# Altium PCB MotorDriver_Version1.0.PcbDoc
Units mm, origin at the board's own origin, x right, y up, seen from the top; angles counter-clockwise.
Board outline 82.93 x 67.82 mm, 2 copper layers (Top Layer, Bottom Layer); 112 components, 70 nets, 341 pads, 134 vias.
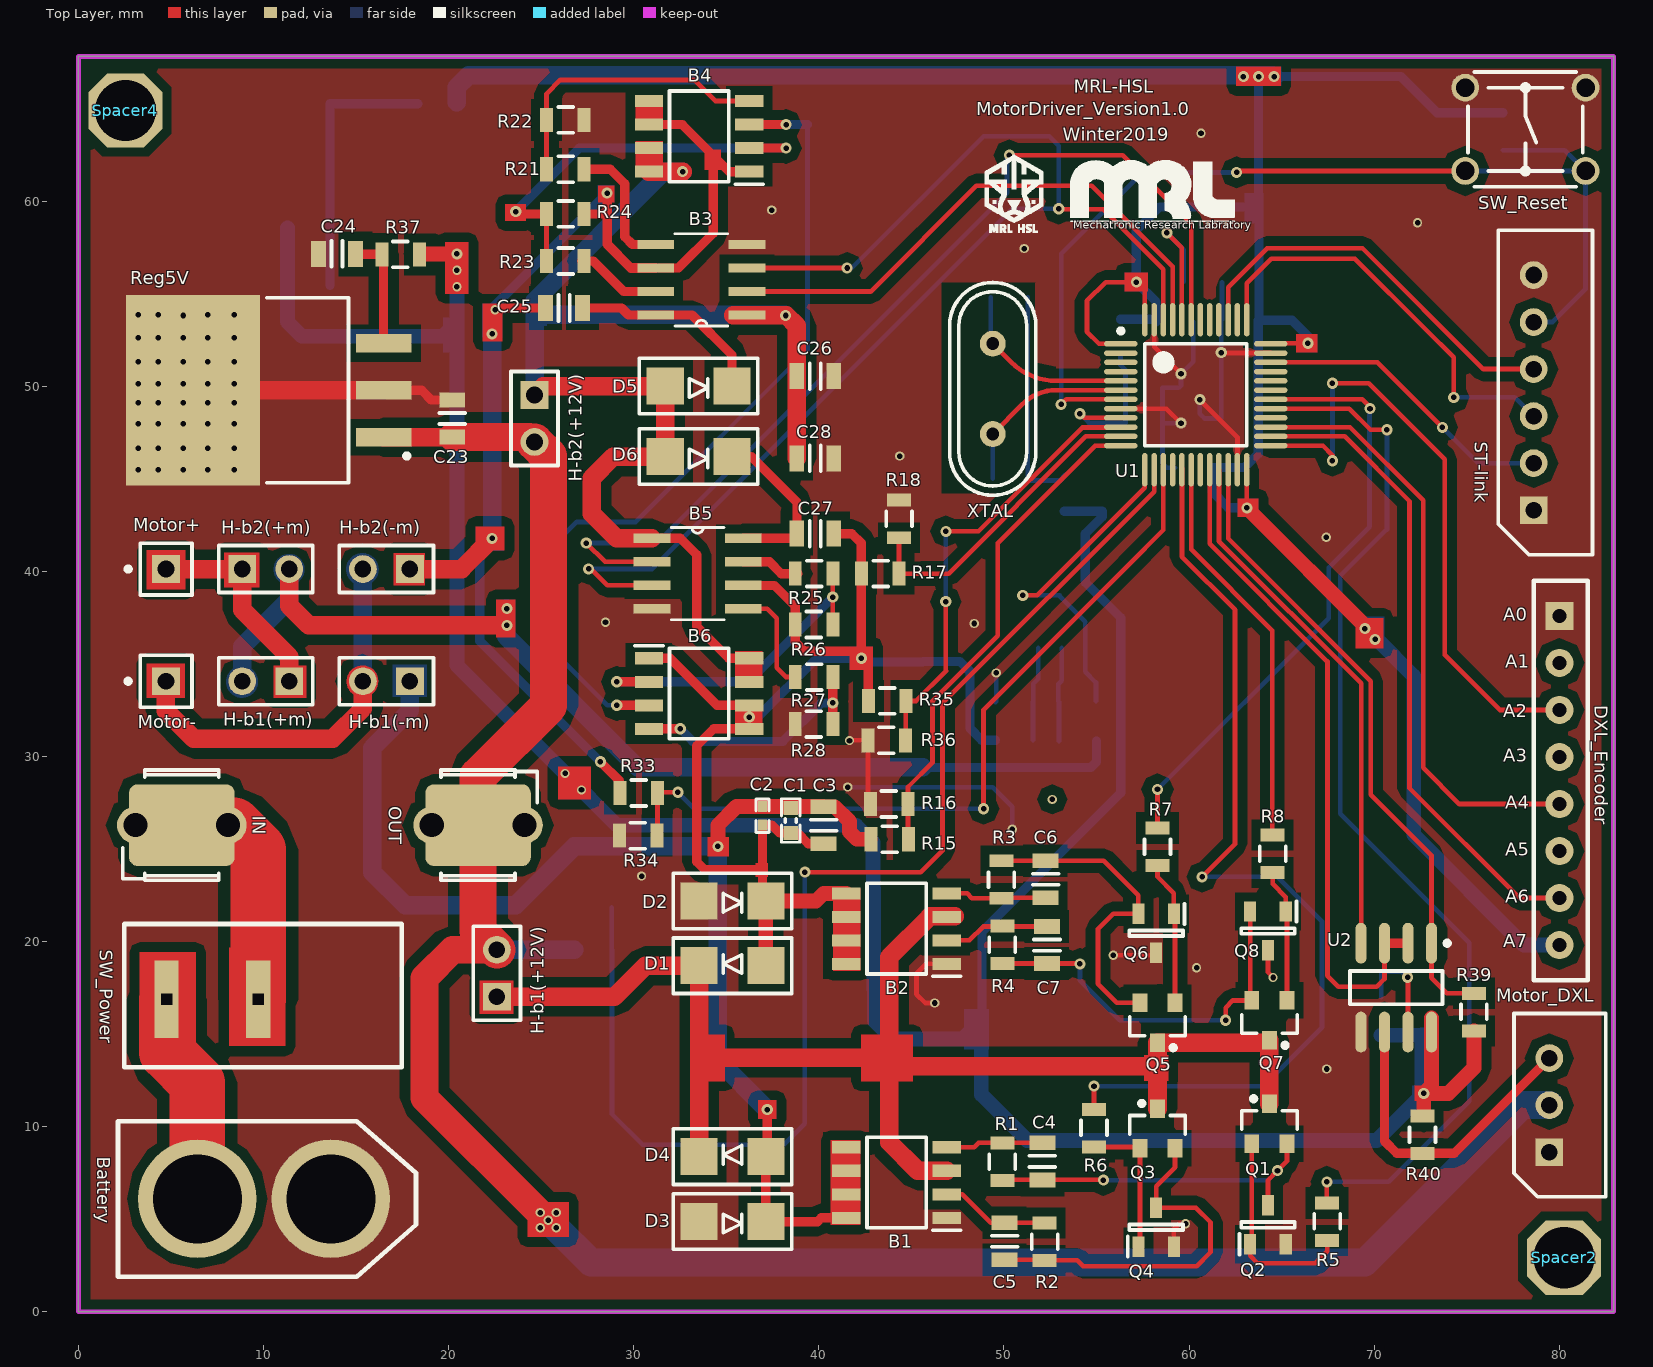
[diagram p0: Top Layer view]
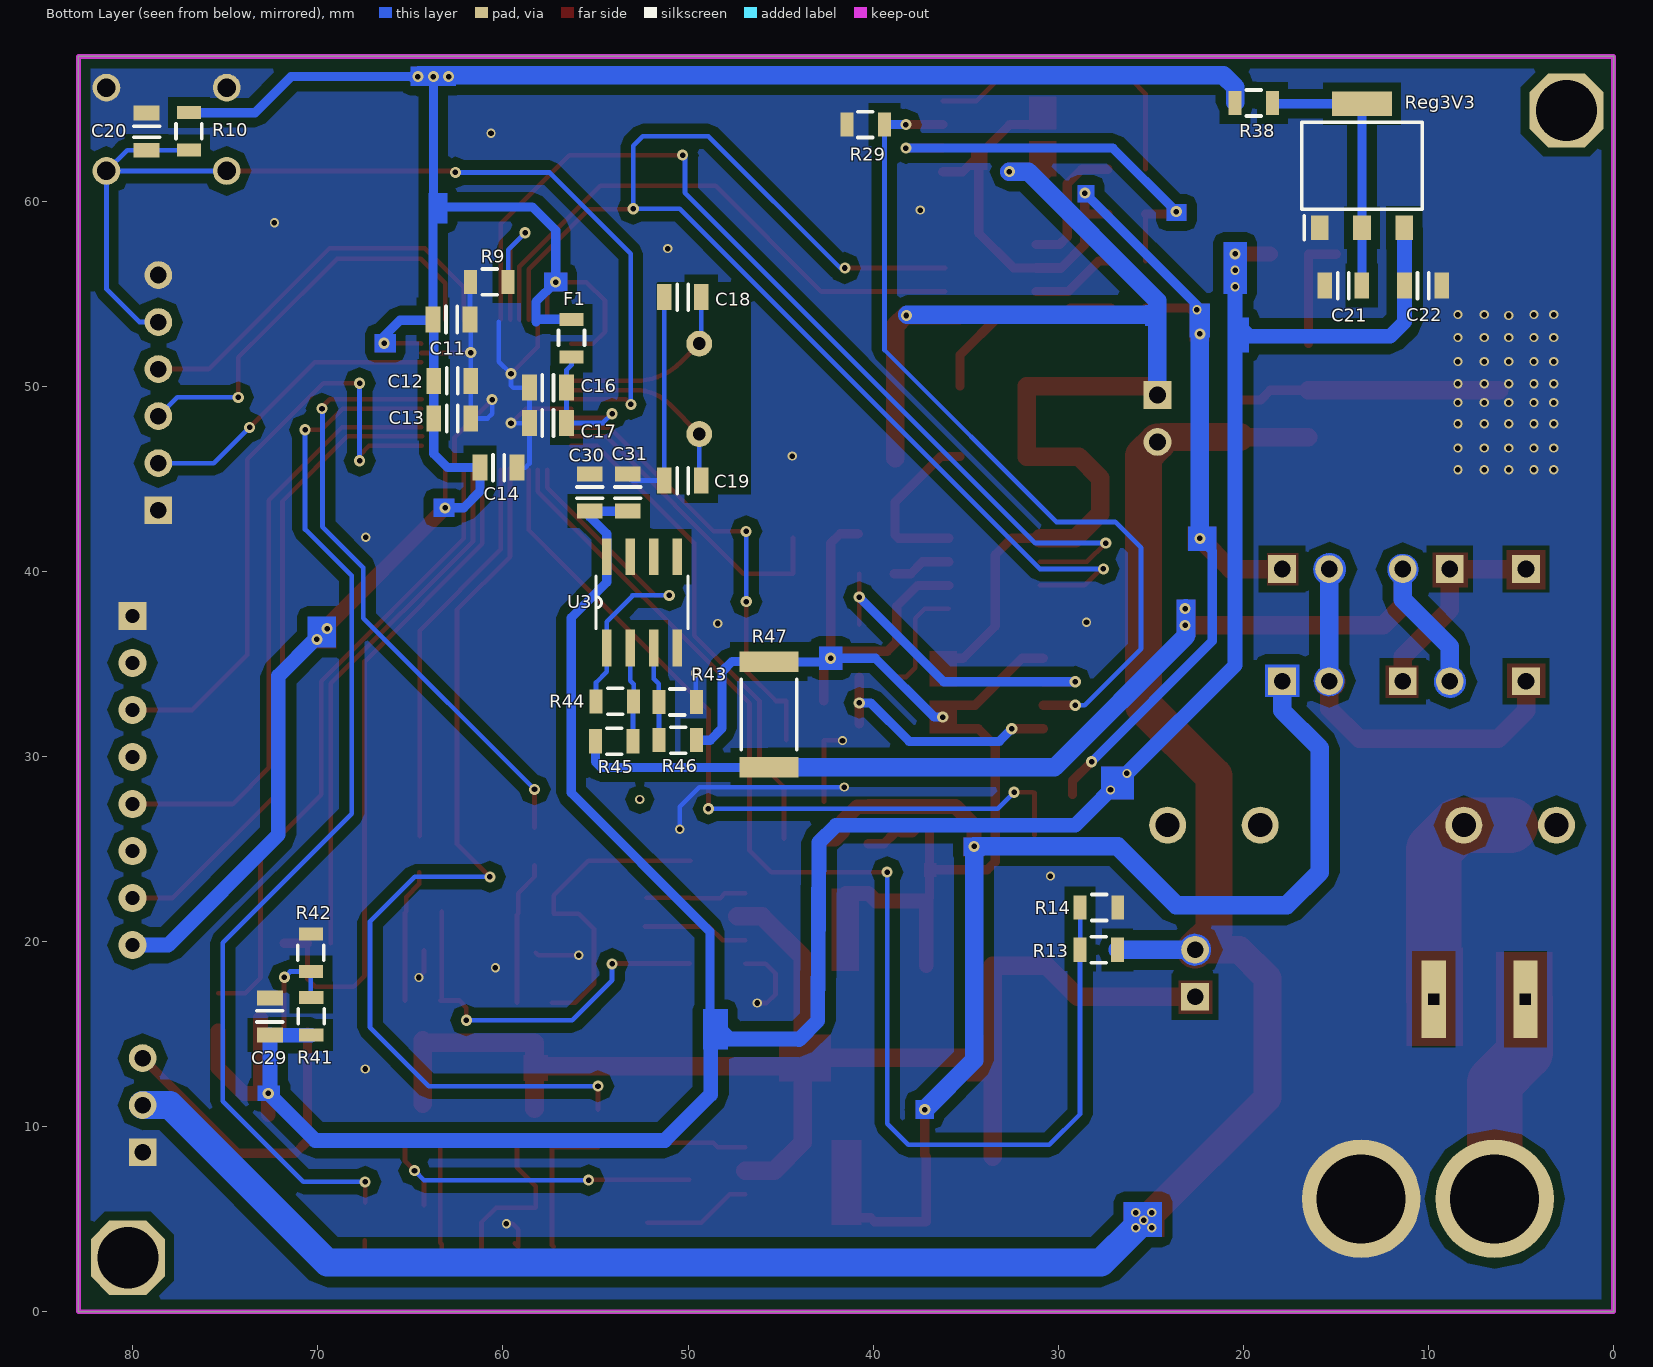
[diagram p1: Bottom Layer view, seen from below]
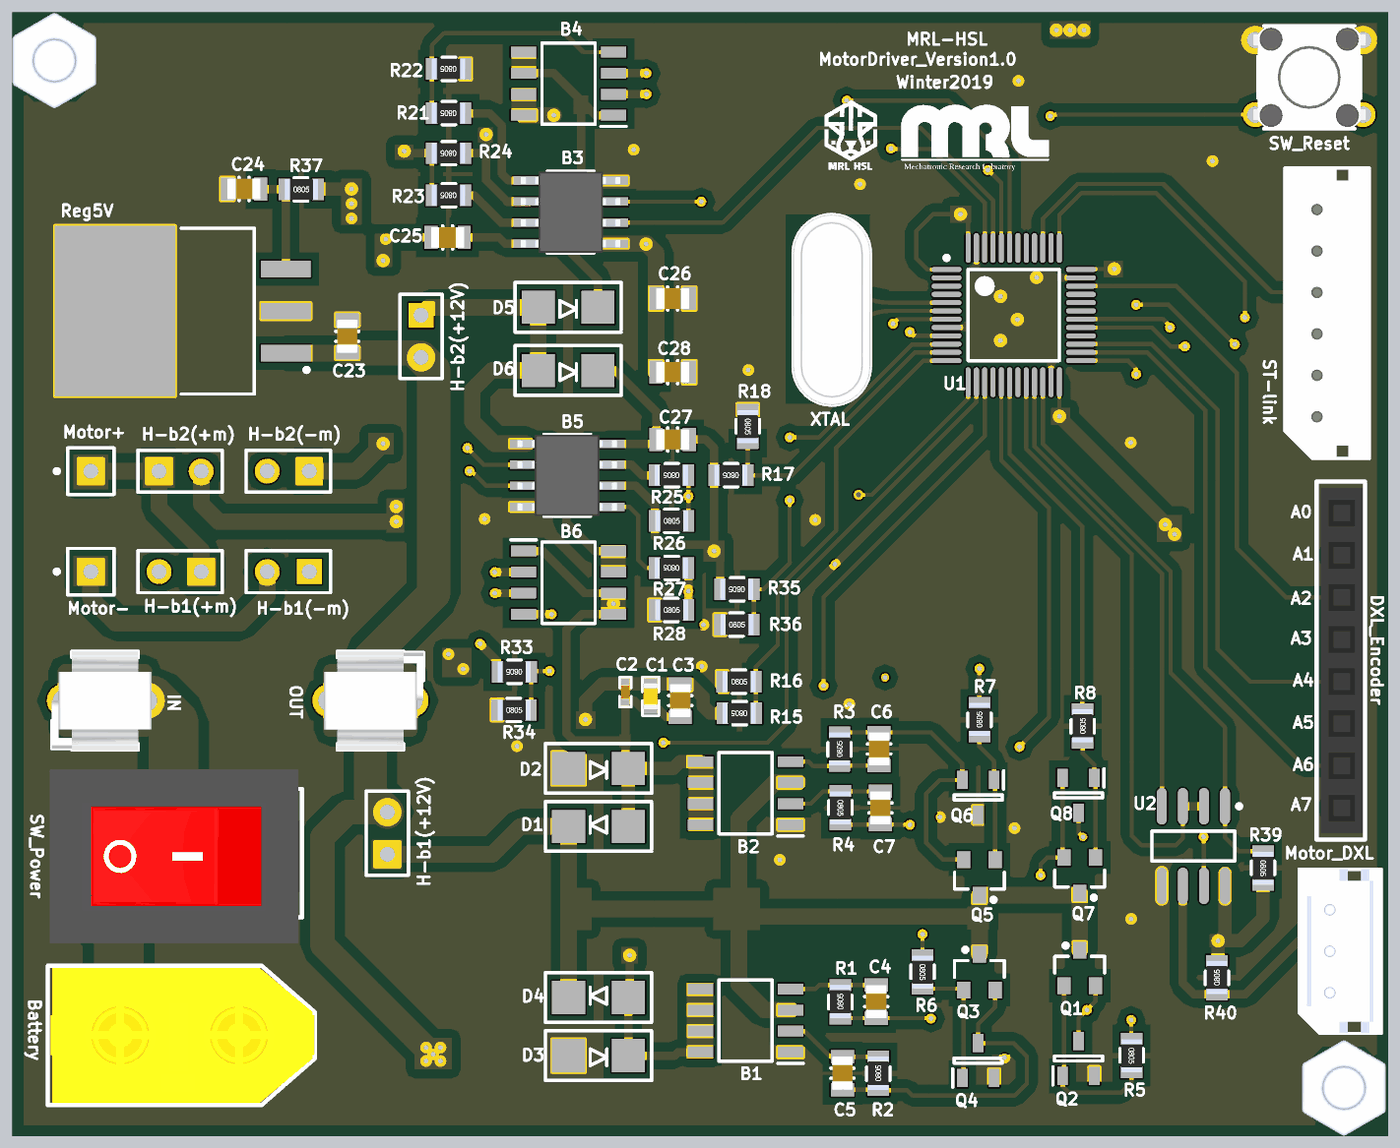
[diagram p2: 3D render of the assembled board from above, using the file's embedded part models]
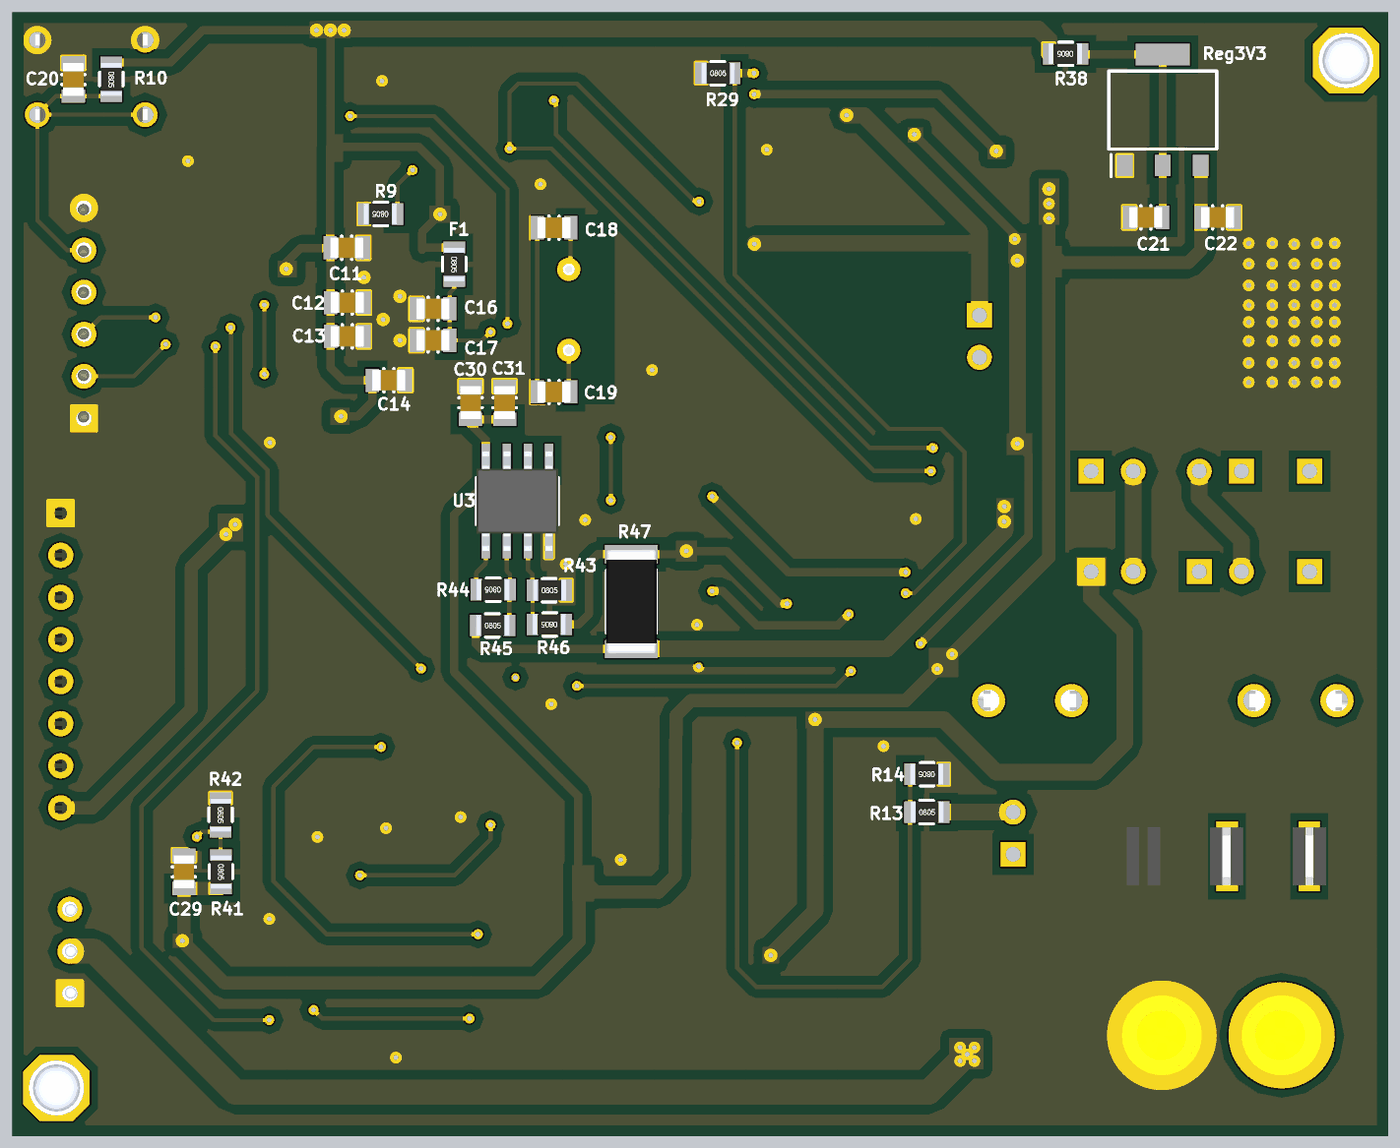
[diagram p3: 3D render of the assembled board from below, using the file's embedded part models]

## Layer stack, top to bottom
Top Solder: solder mask 0.0102, Solder Resist, Dk 3.5
Top Layer: signal copper 0.0356
Dielectric 1: dielectric 0.32, FR-4, Dk 4.8
Bottom Layer: signal copper 0.0356
Bottom Solder: solder mask 0.0102, Solder Resist, Dk 3.5

## Board outline
0,0 0,67.818 82.931,67.818 82.931,0

## Design rules (kind name [scope] priority, off if disabled: settings)
Clearance Clearance_1 [InComponent('U1')] p1: gap=0.2
Clearance [All] p2: gap=0.2 except(0.5: Arc-Poly Track-Poly SMDPad-Poly THPad-Poly Via-Poly Fill-Poly Poly-Poly)
ComponentClearance [All] p1: gap=0.1 collisioncheckmode=3 verticalgap=0.1 showdistances=FALSE
HoleToHoleClearance [All] p1: gap=0 allowstackedmicrovias=TRUE
MinimumSolderMaskSliver [All] p1: minsoldermaskwidth=0
PolygonConnect [All] p1: connectstyle=Direct reliefconductorwidth=0.254 reliefentries=4 polygonreliefangle="90 Angle" airgapwidth=0.254
RoutingVias [All] p1: holewidth=0.3 width=0.6 viastyle="Through Hole" minholewidth=0.3 minwidth=0.6 maxholewidth=0.3 maxwidth=0.6
SMDEntry [All] p1: side=FALSE corner=FALSE anyangle=TRUE
SilkToSilkClearance [All] p1: silktosilkclearance=0
SolderMaskExpansion [All] p1: expansion=0.102
Width [All] p1: maxlimit=3 minlimit=0.254 preferedwidth=0.254
26 further rules are at their usual default settings.

## Classes and differential pairs
component class U_[6]H-bridge2: B3 B4 B5 B6 C25 C26 C27 C28 D5 D6 R21 R22 R23 R24 R25 R26 R27 R28 R29 R33 R34 R35 R36
component class U_[5]Power_ports(DXL&Battery): Battery H-b1(+12V) H-b2(+12V) IN Motor_DXL OUT R13 R14 Spacer2 Spacer4 SW_Power
component class U_[4]Signal_ports(USART&ST-link&Encoder): C29 DXL_Encoder R39 R40 R41 R42 ST-link U2
component class U_[3]Regulator(+5V&3V3): C21 C22 C23 C24 R37 R38 Reg3V3 Reg5V
component class U_[2]Microcontroller: C11 C12 C13 C14 C16 C17 C18 C19 C20 F1 R9 R10 SW_Reset U1 XTAL
component class U_[1]H-bridge1&Current_sensor&NOT_gate: B1 B2 C1 C2 C3 C4 C5 C6 C7 C30 C31 D1 D2 D3 D4 H-b1(+m) H-b1(-m) H-b2(+m) H-b2(-m) Motor+ Motor- Q1 Q2 Q3 Q4 Q5 Q6 Q7 Q8 R1 R2 R3 R4 R5 R6 R7 R8 R15 R16 R17 R18 R43 R44 R45 R46 R47 U3

## Components (designator, comment, footprint, x,y, rotation, side; value= is the part's Value field where it differs from the comment)
B1 "IRF7307" SOIC127P600X175-8N 44.196,6.985 r180 top
B2 "IRF7307" SOIC127P600X175-8N 44.196,20.701 r180 top
B3 "IR2104" *SOIC127P600X175-8N 33.655,55.753 r180 top
B4 "FDS6890A" SOIC127P600X175-8N 33.528,63.5 r180 top
B5 "IR2104" *SOIC127P600X175-8N 33.445,39.878 r0 top
B6 "FDS6890A" SOIC127P600X175-8N 33.528,33.401 r0 top
Battery "XT60" XT60 10.033,6.096 r0 top
C1 "Cap603" Cap603 38.481,26.543 r270 top
C2 "Cap402" Cap402 36.957,26.797 r270 top
C3 "Cap805" cap_805 40.259,26.289 r270 top
C4 "50nF" cap_805 52.07,8.128 r90 top
C5 "50nF" cap_805 50.038,3.81 r90 top
C6 "50nF" cap_805 52.247,23.368 r90 top
C7 "50nF" cap_805 52.324,19.812 r270 top
C11 "100nF" cap_805 62.774,53.606 r0 bottom
C12 "100nF" cap_805 62.738,50.292 r0 bottom
C13 "100nF" cap_805 62.738,48.26 r0 bottom
C14 "10uF" cap_805 60.234,45.605 r0 bottom
C16 "1uF" cap_805 57.567,49.923 r180 bottom
C17 "100nF" cap_805 57.567,48.018 r180 bottom
C18 "18pF" cap_805 50.282,54.811 r180 bottom
C19 "18pF" cap_805 50.282,44.905 r180 bottom
C20 "100nf" cap_805 79.248,63.754 r90 bottom
C21 "10uF" cap_805 14.605,55.435 r180 bottom
C22 "1uF" cap_805 10.287,55.435 r0 bottom
C23 "330nF" cap_805 20.193,48.26 r270 top
C24 "220nF" cap_805 13.97,57.15 r0 top
C25 "100nF" cap_805 26.239,54.229 r0 top
C26 "100nF" cap_805 39.801,50.546 r180 top
C27 "100nF" cap_805 39.801,42.037 r180 top
C28 "100nF" cap_805 39.801,46.101 r180 top
C29 "100nF" cap_805 72.586,15.958 r270 bottom
C30 "0.01uF" cap_805 55.31,44.255 r270 bottom
C31 "3.3uF" cap_805 53.256,44.255 r270 bottom
D1 "Doide_SS34" Doide_SS34 35.433,18.796 r0 top
D2 "Doide_SS34" Doide_SS34 35.233,22.098 r180 top
D3 "Doide_SS34" Doide_SS34 35.233,4.772 r180 top
D4 "Doide_SS34" Doide_SS34 35.433,8.482 r0 top
D5 "Doide_SS34" Doide_SS34 33.401,49.911 r180 top
D6 "Doide_SS34" Doide_SS34 33.401,46.101 r180 top
DXL_Encoder "pinheader 8" "PinHeader Female 8" 80.01,35.052 r270 top
F1 "Res805" Res805 56.297,52.717 r270 bottom
H-b1(+12V) "H-bridge1(+12V)" HDR1X2 22.606,17.018 r90 top
H-b1(+m) "H-bridge1(+Motor)" HDR1X2 11.387,34.066 r180 top
H-b1(-m) "H-bridge1(-Motor)" HDR1X2 17.907,34.066 r180 top
H-b2(+12V) "H-bridge2(+12V)" HDR1X2 24.638,49.53 r270 top
H-b2(+m) "H-bridge2(+Motor)" HDR1X2 8.847,40.126 r0 top
H-b2(-m) "H-bridge2(-Motor)" HDR1X2 17.907,40.126 r180 top
IN "Fuse Clip" FUSH_LITTELFUSE_520 5.588,26.289 r0 top
Motor+ "Plug" PIN1 4.735,40.126 r90 top
Motor- "Plug" PIN1 4.735,34.066 r90 top
Motor_DXL "Molex 22-03-5035" "Molex 22-3-5035" 79.462,8.625 r90 top
OUT "Fuse Clip" FUSH_LITTELFUSE_520 21.588,26.289 r180 top
Q1 "NPN(mmbt2222)" MMBT2222 64.337,10.16 r90 top
Q2 "MMBT2907A-7-F" SOT96P240X100-3N 64.262,4.699 r90 top
Q3 "NPN(mmbt2222)" MMBT2222 58.293,9.906 r90 top
Q4 "MMBT2907A-7-F" SOT96P240X100-3N 58.218,4.572 r90 top
Q5 "NPN(MMBT2222)" MMBT2222 58.293,15.621 r270 top
Q6 "MMBT2907A-7-F" SOT96P240X100-3N 58.218,20.447 r270 top
Q7 "NPN(mmbt2222)" MMBT2222 64.337,15.748 r270 top
Q8 "MMBT2907A-7-F" SOT96P240X100-3N 64.262,20.574 r270 top
R1 "10R" Res805 49.911,8.001 r90 top
R2 "10R" Res805 52.197,3.683 r90 top
R3 "10R" Res805 49.861,23.241 r90 top
R4 "10R" Res805 49.911,19.939 r270 top
R5 "Res805" Res805 67.46,4.988 r270 top
R6 "Res805" Res805 54.864,10.033 r270 top
R7 "Res805" Res805 58.293,25.019 r90 top
R8 "Res805" Res805 64.516,24.638 r90 top
R9 "10k" Res805 60.615,55.638 r0 bottom
R10 "10k" Res805 76.962,63.881 r270 bottom
R13 "15k" Res805 27.924,19.558 r180 bottom
R14 "4k7" Res805 27.686,21.844 r0 bottom
R15 "33K" Res805 43.942,25.527 r180 top
R16 "10K" Res805 43.688,27.432 r0 top
R17 "33K" Res805 43.434,39.878 r180 top
R18 "10K" Res805 44.332,42.944 r270 top
R21 "10R" Res805 26.416,61.722 r180 top
R22 "100K" Res805 26.416,64.389 r180 top
R23 "10R" Res805 26.416,56.769 r180 top
R24 "100K" Res805 26.416,59.309 r180 top
R25 "10R" Res805 39.851,39.878 r180 top
R26 "100K" Res805 39.624,37.13 r0 top
R27 "10R" Res805 39.851,34.29 r180 top
R28 "100K" Res805 39.624,31.75 r0 top
R29 "0R" Res805 40.513,64.135 r180 bottom
R33 "3.3K" Res805 30.379,28.026 r180 top
R34 "1K" Res805 30.127,25.721 r0 top
R35 "3.3K" Res805 43.796,33.001 r180 top
R36 "1K" Res805 43.552,30.872 r0 top
R37 "0R" Res805 17.298,57.126 r0 top
R38 "0R" Res805 19.335,65.302 r0 bottom
R39 "5K" Res805 75.385,16.305 r270 top
R40 "3K" Res805 72.61,9.463 r90 top
R41 "3K" Res805 70.355,16.072 r270 bottom
R42 "3k" Res805 70.376,19.508 r270 bottom
R43 "Res805" Res805 50.672,32.943 r180 bottom
R44 "Res805" Res805 53.839,32.978 r0 bottom
R45 "Res805" Res805 50.437,30.882 r0 bottom
R46 "Res805" Res805 54.097,30.822 r180 bottom
R47 "0.005R" "RES 2512 (6331X07L)" 45.619,32.26 r90 bottom
Reg3V3 "ams1117-3.3v" SOT229P700X180-4N 13.589,61.912 r90 bottom
Reg5V "MC7805CD2TR4G" TO254P1420X457-4N 10.287,49.784 r180 top
Spacer2 "Spacer 12mm" "Spacer 12mm"#1 80.264,2.921 r90 top
Spacer4 "Spacer 12mm" "Spacer 12mm"#2 2.54,64.897 r90 top
ST-link "Molex 22-03-5065" "Molex 22-03-5065" 78.613,43.307 r90 top
SW_Power "SW_KCD11" SW_KCD11 7.239,16.891 r0 top
SW_Reset "Push Button" PB_OMRON_B3F-1000 78.17,63.881 r180 top
U1 "STM32F103C8T6" STM-LQFP48_N 60.361,49.542 r0 top
U2 "MAX485CSA" NSO8_N 71.189,17.513 r270 top
U3 "AD826ARZ-REEL-REEL7" *SOIC127P600X175-8N 52.487,38.32 r90 bottom
XTAL "8MHz" XTAL_HC-49/U 49.393,49.858 r90 top

## Footprints (in the part's own frame and the unit in brackets; to place one, negate y for a bottom-side part, rotate by r counter-clockwise, add the part's x,y. Pads: shape width x height; smd on the part's side, far side on the other; paste and mask are expansions set on the pad)
*SOIC127P600X175-8N [mil]
  rect 78x20 smd: 1(-97,75) 2(-97,25) 3(-97,-25) 4(-97,-75) 5(97,-75) 6(97,-25) 7(97,25) 8(97,75)
  silkscreen extent -56,-98 56,98, body extent -118,-96 118,96, height 69
Cap402 [mm]
  rect 0.6x0.5 smd: 1(-0.5,0) 2(0.5,0)
  silkscreen extent -0.9,-0.35 0.9,0.35, body extent -0.51,-0.25 0.51,0.25, height 0.5
Cap603 [mm]
  rect 0.75x0.8 smd: 1(-0.675,0) 2(0.675,0)
  silkscreen extent -1.18,-0.5 1.17,0.5, body extent -0.8,-0.43 0.8,0.43, height 0.8
cap_805 [mm]
  rect 0.8x1.4 smd: 1(-1,0) 2(1,0)
  silkscreen extent -0.3,-0.7 0.3,0.7, body extent -1,-0.62 1,0.63, height 1
Doide_SS34 [mm]
  rect 2x2 smd: 1(-1.9,-0.1) 2(1.7,-0.1)
  silkscreen extent -3.3,-1.6 3.1,1.4, body extent -2.5,-1.3 2.3,1.1, height 1.5
FUSH_LITTELFUSE_520 [mm]
  round 2 hole 1.3: 1(-2.5,0) 1(2.5,0)
  rrect20% 5.7x4.4 smd paste-2.2 mask-2.2: 1(0,0)
  silkscreen extent -3.2,-2.98 2,2.98, body extent -3.2,-2.98 2.8,2.98, height 10
HDR1X2 [mm]
  rect 1.5x1.5 hole 0.9: 1(0,0)
  round 1.5 hole 0.9: 2(2.54,0)
  silkscreen extent -1.27,-1.27 3.81,1.27
MMBT2222 [mm]
  rect 1x0.8 smd: 1(-1.075,0.95) 2(-1.075,-0.95) 3(1.075,0)
  silkscreen extent -0.3,-1.5 1.47,1.5, body extent -0.7,-1.5 0.7,1.5, height 1.1
"Molex 22-3-5035" [mm]
  rect 1.5x1.5 hole 0.9: 1(0,0)
  round 1.5 hole 0.9: 2(2.54,0) 3(5.08,0)
  silkscreen extent -2.41,-3.05 7.49,1.91, body extent -2.41,-3.05 7.49,1.85, height 5.95
"Molex 22-03-5065" [mm]
  rect 1.5x1.5 hole 0.9: 1(0,0)
  round 1.5 hole 0.9: 2(2.54,0) 3(5.08,0) 4(7.62,0) 5(10.16,0) 6(12.7,0)
  silkscreen extent -2.41,-3.18 15.11,1.9, body extent -2.35,-3.1 15.05,1.8, height 5.95
NSO8_N [mm] "SOIC, 8-Leads, Body 4.9x3.9mm, Pitch 1.27mm, IPC Medium Density"
  oval 2.2x0.6 smd: 1(-2.4,1.905) 2(-2.4,0.635) 3(-2.4,-0.635) 4(-2.4,-1.905) 5(2.4,-1.905) 6(2.4,-0.635) 7(2.4,0.635) 8(2.4,1.905)
  silkscreen extent -2.52,-2.5 0.9,2.88, body extent -2,-2.5 2,2.5, height 1.75
PB_OMRON_B3F-1000 [mm]
  round 1.5 hole 1: 1(-3.25,2.25) 2(3.25,2.25) 3(-3.25,-2.25) 4(3.25,-2.25)
  silkscreen extent -3.1,-3.1 3.1,3.1, body extent -3.4,-3.1 3.4,3.1, height 4.3
PIN1 [mm] "Connector; Plug"
  rect 1.5x1.5 hole 0.9: 1(0,0)
  silkscreen extent -1.4,-1.4 1.4,2.17
"PinHeader Female 8" [mil]
  rect 60x60 hole 30: A0(-100,0)
  round 60 hole 30: A1(0,0) A2(100,0) A3(200,0) A4(300,0) A5(400,0) A6(500,0) A7(600,0)
  silkscreen extent -175,-55 675,60, body extent -160,-45 660,55, height 335
Res805 [mm]
  rect 0.7x1.3 smd: 1(-0.9,0) 2(1.127,0)
  silkscreen extent -0.3,-0.7 0.5,0.7, body extent -0.87,-0.62 1.13,0.63, height 0.37
"RES 2512 (6331X07L)" [mm] "Chip Resistor, 2-Leads, Body 6.3x3.1mm, IPC High Density _ (0.500 W)"
  rect 1.1x3.2 smd: 1(-2.85,0) 2(2.85,0)
  silkscreen extent -1.9,-1.5 1.9,1.5, body extent -3.18,-1.52 3.17,1.52, height 0.6
SOIC127P600X175-8N [mm]
  rect 1.525x0.65 smd: 1(-2.712,1.905) 2(-2.712,0.635) 3(-2.712,-0.635) 4(-2.712,-1.905) 5(2.712,-1.905) 6(2.712,-0.635) 7(2.712,0.635) 8(2.712,1.905)
  silkscreen extent -3.48,-2.45 1.6,2.58
SOT96P240X100-3N [mm]
  rect 1.1x0.65 smd: 1(-1.05,0.96) 2(-1.05,-0.96) 3(1.05,0)
  silkscreen extent -1.6,-1.45 0.15,1.53
SOT229P700X180-4N [mm]
  rect 1.3x0.95 smd: 1(-3.35,2.29) 2(-3.35,0) 3(-3.35,-2.29)
  rect 1.3x3.25 smd: 4(3.35,0)
  silkscreen extent -4,-3.25 2.35,3.25
"Spacer 12mm"#1 [mm]
  oct 4x4 hole 3.3: 0(0,0)
  body extent -2.88,-2.52 2.88,2.52, height 8.3
"Spacer 12mm"#2 [mm]
  oct 4x4 hole 3.3: 1(0,0)
  body extent -2.88,-2.52 2.88,2.52, height 8.3
STM-LQFP48_N [mm] "QFP, 48-Leads, Body 7x7mm, Pitch 0.5mm, IPC Medium Density"
  oval 1.8x0.3 smd: 1(-4.05,2.75) 2(-4.05,2.25) 3(-4.05,1.75) 4(-4.05,1.25) 5(-4.05,0.75) 6(-4.05,0.25) 7(-4.05,-0.25) 8(-4.05,-0.75) 9(-4.05,-1.25) 10(-4.05,-1.75) 11(-4.05,-2.25) 12(-4.05,-2.75) 25(4.05,-2.75) 26(4.05,-2.25) 27(4.05,-1.75) 28(4.05,-1.25) 29(4.05,-0.75) 30(4.05,-0.25) 31(4.05,0.25) 32(4.05,0.75) 33(4.05,1.25) 34(4.05,1.75) 35(4.05,2.25) 36(4.05,2.75)
  oval 0.3x1.8 smd: 13(-2.75,-4.05) 14(-2.25,-4.05) 15(-1.75,-4.05) 16(-1.25,-4.05) 17(-0.75,-4.05) 18(-0.25,-4.05) 19(0.25,-4.05) 20(0.75,-4.05) 21(1.25,-4.05) 22(1.75,-4.05) 23(2.25,-4.05) 24(2.75,-4.05) 37(2.75,4.05) 38(2.25,4.05) 39(1.75,4.05) 40(1.25,4.05) 41(0.75,4.05) 42(0.25,4.05) 43(-0.25,4.05) 44(-0.75,4.05) 45(-1.25,4.05) 46(-1.75,4.05) 47(-2.25,4.05) 48(-2.75,4.05)
  silkscreen extent -4.17,-2.75 2.75,3.57, body extent -3.5,-3.5 3.5,3.5, height 1.6
SW_KCD11 [mm]
  rect 1.3x4.2 hole 0.6 square: 1(-2.476,0) 2(2.477,0)
  silkscreen extent -4.76,-3.68 10.22,4.06, body extent -5.02,-5.25 10.04,5.25, height 12.51
TO254P1420X457-4N [mm]
  rect 3x1 smd: 1(-6.2,2.54) 2(-6.2,0) 3(-6.2,-2.54)
  rect 7.25x10.3 smd: 4(4.1,0)
  silkscreen extent -7.58,-5 0.1,5
XT60 [mm]
  round 6.4 hole 4.8: 1(-3.61,0) 2(3.61,0)
  silkscreen extent -7.9,-4.2 8.2,4.2, body extent -7.72,-4.07 8.18,4.07, height 17
XTAL_HC-49/U [mm]
  round 1.4 hole 0.7: 1(-2.44,0) 2(2.44,0)
  silkscreen extent -5.75,-2.33 5.75,2.33, body extent -5.75,-2.33 5.75,2.33, height 3.5

## Part data
B1 B2: "Power MOSFET"
B3 B5: library part IR2104STRPBF, "Half Bridge Driver, Single Input Plus Inverting Shutdown Pin, Fixed 520ns Deadtime in a 8-Lead package"
B4 B6: "FDS6890A, Dual N-channel MOSFET Transistor 7.5 A 20 V, 8-Pin SOIC"
C3 C4 C5 C6 C7 C11 C12 C13 C14 C16 C17 C18 C19 C20 C21 C22 C23 C24 C25 C26 C27 C28 C29 C30 C31: library part cap805
H-b1(+12V) H-b1(+m) H-b1(-m) H-b2(+12V) H-b2(+m) H-b2(-m): library part "Header 2", "Header, 2-Pin"
IN OUT: library part FUSH_LITTELFUSE_52000001009
Q1 Q3 Q5 Q7: library part MMBT2222
Q2 Q4 Q6 Q8: "Diodes Inc MMBT2907A-7-F PNP Bipolar Transistor, -600 mA, -60 V, 3-Pin SOT-23"
R1 R2 R3 R4 R9 R10 R13 R14 R15 R16 R17 R18 R21 R22 R23 R24 R25 R26 R27 R28 R29 R33 R34 R35 R36 R37 R38 R39 R40 R41 R42: library part Res805
R47: library part RES, "Resistor"
Reg3V3: "1A LOW DROPOUT VOLTAGE REGULATOR, SOT-223"
SW_Power: "KCD11"
SW_Reset: library part PB_OMRON_B3F-1000, "Push-Button Switch SPDT"
U1: "ARM Cortex-M3 32-bit MCU, 64 KB Flash, 20 KB Internal RAM, 37 I/Os, 48-pin LQFP, -40 to 85 degC, Tray"
U2: "Low-Power, Slew-Rate-Limited RS-485/RS-422 Transceiver"
U3: "OP Amp Dual Volt Fdbk Â±18V/36V 8-Pin SO T/R"
XTAL: library part XTAL_20MHZ_AEL_HC-49/U, "Quartz Crystal"

## Via types
v1: diameter 0.5, hole 0.3, Top Layer to Bottom Layer, 70 vias
v2: diameter 0.6, hole 0.3, Top Layer to Bottom Layer, 64 vias

## Nets (pads, with @x,y where several pads share a name; then routed paths per layer and width w, separated by ;. In a path a pad name is that pad's centre, name@x,y a point inside that pad or via, vN(x,y) a via of type N, cw(c..) or ccw(c..) an arc to the next point about the centre after c; other vN are vias at no path point)
3V3: C11.2 C12.2 C13.2 C14.2 DXL_Encoder.A7 F1.1 R10.1 R38.2 U1.1 U1.24 U1.36 U1.48 | length 147.9
  Top Layer w0.254: U1.1 55.133,52.292 54.483,52.942 54.483,54.61 55.499,55.626 v2(57.15,55.626) 57.611,55.165 U1.48 ; U1.24 63.111,43.442 v2(63.119,43.434) ; U1.36 64.443,52.324 v2(66.421,52.324) ; 69.774,36.779 70.053,36.5 v2(70.053,36.322)
  Top Layer w0.8: v2(63.119,43.434) 69.774,36.779
  Bottom Layer w0.5: F1.1 58.08,53.617 ; 58.218,53.479 58.218,54.558 v2(57.15,55.626) 57.15,58.42 58.42,59.69 63.774,59.69 ; v2(63.119,43.434) 62.122,43.434 61.234,44.322 C14.2 62.984,45.605 63.738,46.359 C13.2 C12.2 63.738,53.57 65.556,53.57 66.421,52.705 v2(66.421,52.324) ; v2@63.754,66.802 63.754,59.71 63.774,59.69 ; C11.2 63.774,59.69 ; v2(64.593,66.728) 71.448,66.728 73.395,64.781 R10.1
  Bottom Layer w0.8: v2(70.053,36.322) 70.155,36.322 72.136,34.341 72.136,32.385 72.136,25.767 78.091,19.812 DXL_Encoder.A7
  Bottom Layer w1: R38.2@20.431,65.341 20.431,66.151 21.082,66.802 64.518,66.802 v2(64.593,66.728)
  other v2: 69.494,36.906 62.93,66.728 63.754,66.728
+5V: C22.2 C29.2 C30.2 C31.2 R37.2 R39.2 R40.2 R41.2 Reg3V3.3 U2.8 U3.8 | length 162.8
  Top Layer w0.8: R37.2@18.526,57.15 v2(20.447,57.15) ; R40.2@72.675,10.655 v2(72.675,11.797) ; U2.8@73.094,15.875 73.094,12.215 v2(72.675,11.797) ; R39.2 75.385,13.17 74.012,11.797 v2(72.675,11.797)
  Bottom Layer w0.5: 43.997,14.713 43.997,14.745 ; 48.819,14.529 48.819,20.549 56.312,28.041 56.312,37.498 54.392,39.417 U3.8 54.392,42.031 55.31,42.949 C30.2 C31.2
  Bottom Layer w0.8: Reg3V3.3@11.287,58.55 C22.2 11.287,53.483 12.065,52.705 19.685,52.705 20.447,53.467 ; v2(20.447,57.15) 20.447,34.925 v1(26.289,29.083) 29.083,26.289 42,26.289 42.926,25.363 42.988,15.722 43.997,14.713 ; 43.997,14.745 47.752,14.732 48.768,15.748 48.768,11.745 51.251,9.262 70.14,9.262 v2(72.675,11.797) ; R41.2 C29.2@72.574,14.945 ; v2@72.586,11.886 C29.2
  other v1: 27.178,28.194 20.447,55.372 20.447,56.261
+12V: C23.2 H-b1(+12V).2 H-b2(+12V).2 Motor_DXL.2 OUT.1 R13.2 Reg5V.1 | length 129.4
  Top Layer w0.254: 23.394,19.533 ccw(c22.631,19.533) 23.394,19.533
  Top Layer w1: Reg5V.1 C23.2@20.177,47.244 ; 24.368,47.26 24.638,46.99
  Top Layer w1.5: C23.2 24.368,47.26 ; 22.606,19.558 20.218,19.558 18.694,18.034 18.694,11.557 v1@24.943,5.309
  Top Layer w2: 22.606,19.558 21.588,20.576 21.588,26.289 21.588,28.935 25.402,32.749 25.402,46.226 24.638,46.99
  Bottom Layer w0.254: 23.347,19.558 ccw(c22.606,19.558) 23.347,19.558
  Bottom Layer w1: 22.606,19.558 R13.2
  Bottom Layer w1.5: v1(25.806,4.547) 27.686,2.667 69.494,2.667 78.003,11.176 Motor_DXL.2@79.451,11.176
  other v1: 24.943,4.547 25.375,4.953 24.943,5.359 25.806,5.359
GND: B1.1 B2.1 B3.4 B5.4 Battery.2 C11.1 C12.1 C13.1 C14.1 C16.1 C17.1 C18.1 C19.1 C20.2 C21.1 C22.1 C23.1 C24.1 C26.1 C28.1 C29.1 C30.1 C31.1 D2.2 D3.2 DXL_Encoder.A0 Motor_DXL.1 Q2.2 Q4.2 Q6.3 Q8.3 R9.2 R14.1 R16.1 R18.1 R22.1 R28.1 R29.1 R34.1 R36.1 R42.1 R43.2 Reg3V3.1 Reg5V.2 Reg5V.4 ST-link.1 ST-link.6 SW_Reset.3 SW_Reset.4 U1.8 U1.23 U1.35 U1.47 U2.5 U3.4 | length 87.1
  Top Layer w0.254: v1(41.656,30.861) 41.652,30.861 41.64,30.872 R36.1 R16.1@42.652,27.568 ; v1(46.26,16.683) 45.746,16.683 45.272,17.157 45.272,18.272 45.796,18.796 B2.1 ; v1(55.91,19.26) 58.081,19.26 Q6.3 ; U1.8 58.777,48.792 v2(59.563,48.006) ; U1.47 58.111,52.125 v2(59.563,50.673) ; Q4.2@59.353,3.697 Q4.2 59.178,4.467 59.463,4.752 v1(59.808,4.752) ; v2(60.579,49.276) 62.611,47.244 U1.23 ; v2@61.738,51.792 U1.35 ; Q8.3 64.262,18.338 v1(64.539,18.061)
  Top Layer w0.5: Reg5V.2 18.542,49.784 19.066,49.26 C23.1
  Top Layer w1: Reg5V.4 Reg5V.2
  Bottom Layer w0.254: v1(41.56,28.345) 49.39,28.345 50.45,27.284 50.448,27.282 v1(50.448,26.073) ; R43.2 49.576,32.974 v1(49.576,34.512) ; C18.1 C19.1 53.008,44.905 C31.1@53.315,45.212 ; C17.1@58.579,48.006 v2(59.563,48.006) ; C14.1 58.789,45.605 58.567,45.827 C17.1 C16.1 59.448,49.923 59.563,50.038 v2(59.563,50.673) 60.218,51.328 60.218,53.479 ; v2(60.579,49.276) 60.579,48.514 60.833,48.26 C13.1 C12.1 v2(61.738,51.816) C11.1@61.738,53.57 ; C11.1 R9.2@61.774,55.606
  other v1: 67.438,13.117 60.406,18.593 30.422,23.538 48.398,37.184 28.473,37.245 67.411,41.849 3.226,45.491 4.303,45.491 5.664,45.491 6.985,45.491 8.407,45.491 44.368,46.226 3.226,46.66 4.303,46.66 5.664,46.66 6.985,46.66 8.407,46.66 3.226,47.981 4.303,47.981 5.664,47.981 6.985,47.981 8.407,47.981 3.226,49.119 4.303,49.119 5.664,49.119 6.985,49.119 8.407,49.119 3.226,50.14 4.303,50.14 5.664,50.14 6.985,50.14 8.407,50.14 3.226,51.333 4.303,51.333 5.664,51.333 6.985,51.333 8.407,51.333 3.226,52.629 4.303,52.629 5.664,52.629 6.985,52.629 8.407,52.629 5.664,53.823 3.226,53.873 4.303,53.873 6.985,53.873 8.407,53.873 51.097,57.437 72.342,58.833 37.456,59.518 60.644,63.668
H-BRIDGE1(+12V): B1.3 B2.3 D1.1 D4.1 H-b1(+12V).1 Q1.3 Q3.3 Q5.3 Q7.3 | length 78.1
  Top Layer w1: 22.606,17.018 28.956,17.018 30.634,18.696 D1.1 33.533,13.716 ; D4.1 33.533,13.716 ; 43.383,13.259 58.293,13.259 Q5.3 Q7.3@64.21,14.546 ; 44.196,13.716 33.533,13.716 ; B1.3 45.339,7.62 43.79,9.169 43.79,19.152 45.999,21.361 B2.3@47.346,21.361 ; Q3.3 58.293,12.763 ; Q1.3 Q7.3
H-BRIDGE2(+12V): B3.1 B4.7 B4.8 B5.1 B6.7 B6.8 C26.2 C28.2 D5.2 D6.2 H-b2(+12V).1 | length 76.1
  Top Layer w0.5: B4.8 B4.7 ; B5.1 32.512,41.783 33.401,40.894 33.401,37.041 35.136,35.306 B6.8 B6.7 ; D5.2@31.605,50.011 D5.2
  Top Layer w1: 24.638,49.53 25.119,50.011 D5.2@31.605,50.011 ; B4.8 v2(32.639,61.595) ; B5.1 29.072,41.783 27.732,43.123 27.732,45.035 28.898,46.201 D6.2 D5.2 ; B3.1@35.382,53.848 38.227,53.848 38.801,53.274 C28.2
  Bottom Layer w1: 24.638,49.53 24.638,54.61 31.623,61.595 v2(32.639,61.595) ; 24.638,53.848 24.663,53.873 v2@38.151,53.873
  other v2: 38.202,53.823
H-BRIDGE2SHUTDOWN: B3.3 B5.3 U1.46 | length 70.4
  Top Layer w0.254: v2(27.559,40.132) 27.686,40.132 28.575,39.243 B5.3 ; B3.3 v2(41.529,56.388) ; v2@52.959,59.563 55.372,59.563 58.611,56.324 U1.46
  Bottom Layer w0.254: v2(27.559,40.132) 30.988,40.132 50.444,59.588 v2(52.959,59.588) 52.959,62.992 52.451,63.5 48.895,63.5 41.783,56.388 v2(41.529,56.388)
IP+: B2.5 B2.6 B2.7 B2.8 B5.6 B6.1 B6.5 B6.6 C1.2 C2.2 C3.2 C27.1 D1.2 D2.1 R17.2 R26.1 R35.2 R45.1 R47.2 | length 78.5
  Top Layer w0.254: B6.5 v2(36.24,32.131) B6.6 ; C1.2 C1.2@38.844,25.868 ; 41.916,35.687 v2@42.291,35.312 ; v2@42.291,35.306 v2@42.291,35.312 ; v2(42.297,35.306) v2@42.291,35.312
  Top Layer w0.5: B6.1 31.959,35.306 34.499,32.766 B6.6 ; B5.6 37.592,39.243 38.724,38.111 R26.1 38.724,36.206 39.243,35.687 41.916,35.687 ; B6.5 34.315,31.496 33.401,30.582 33.401,24.308 33.833,23.876 36.957,23.876 ; D2.1 36.957,22.374 36.957,23.876 ; C1.2 37.886,25.868 37.457,26.297 C2.2 36.957,23.876 ; C1.2@38.844,25.868 39.423,25.289 C3.2 ; C27.1 41.783,42.037 42.291,41.529 v2@42.291,35.312 ; B2.8 B2.7 B2.6 B2.5 ; v2(42.297,35.306) 42.669,34.934 R35.2
  Top Layer w0.8: D1.2 D2.1 39.851,22.198 40.259,22.606 B2.5
  Bottom Layer w0.5: v2(36.24,32.131) 36.703,32.131 39.878,35.306 v2(42.297,35.306) 42.493,35.11 R47.2 45.645,35.137 47.617,35.137 48.165,34.588 48.165,31.524 48.164,31.523 48.805,30.882 R45.1
IP-: H-b1(+m).2 H-b2(+m).2 R46.1 R47.1 | length 68.1
  Top Layer w1: 11.387,40.126 11.387,38.143 12.445,37.085 12.444,37.084 v2@23.114,37.084
  Bottom Layer w0.254: 9.583,34.036 ccw(c8.839,34.036) 9.583,34.036 ; 12.098,40.107 ccw(c11.379,40.107) 12.098,40.107
  Bottom Layer w0.5: v2@23.114,37.951 v2@23.151,37.988 ; R47.1 54.688,29.41 54.997,29.719 R46.1
  Bottom Layer w1: 8.847,34.066 8.847,35.941 11.387,38.481 11.387,40.126 ; v2@23.114,37.998 23.114,36.5 30.204,29.41 R47.1
  other v2: 23.142,37.084 23.142,37.991
NetB1_2: B1.2 C5.2 R2.2 | length 5.9
  Top Layer w0.254: B1.2 47.752,6.35 49.292,4.81 C5.2 R2.2
NetB1_4: B1.4 C4.2 R1.2 | length 5.3
  Top Layer w0.254: B1.4 48.387,8.89 48.625,9.128 R1.2 C4.2
NetB1_5: B1.5 B1.6 B1.7 B1.8 C1.1 C2.1 C3.1 D3.1 D4.2 H-b1(-m).1 R15.2 | length 72.4
  Top Layer w0.5: v2(37.211,10.922) 37.211,8.46 D4.2 D3.1 39.924,4.872 40.132,5.08 B1.8 B1.7 B1.6 B1.5 ; C1.1@38.402,27.297 C1.1@38.532,27.294
  Top Layer w0.8: v2(34.544,25.146) 34.544,26.289 35.552,27.297 C2.1 C1.1@38.402,27.297 ; C1.1@38.532,27.294 C3.1@40.239,27.294 ; C3.1 40.859,27.289 41.656,26.492 41.656,25.933 42.062,25.527 R15.2@42.774,25.527
  Bottom Layer w1: 17.907,34.066 17.907,32.487 15.875,30.455 15.875,23.749 17.653,21.971 23.622,21.971 26.797,25.146 v2(34.544,25.146) 34.544,13.589 v2(37.211,10.922)
NetB2_2: B2.2 C7.1 R4.1 | length 5.7
  Top Layer w0.254: B2.2 48.133,20.066 48.879,20.812 C7.1
NetB2_4: B2.4 C6.1 R3.1 | length 5.5
  Top Layer w0.254: B2.4 48.006,22.606 48.271,22.341 R3.1 49.888,22.368 C6.1
NetB3_2: B3.2 U1.45 | length 30
  Top Layer w0.254: B3.2 42.799,55.118 48.514,60.833 54.744,60.833 59.111,56.466 U1.45
NetB3_5: B3.5 R21.1 | length 7.2
  Top Layer w0.5: R21.1 28.734,61.722 29.516,60.94 29.516,58.074 29.932,57.658 B3.5
NetB3_6: B3.6 B4.1 B4.5 B4.6 C25.1 H-b2(-m).1 R24.1 R33.2 | length 70.5
  Top Layer w0.254: B4.6 B4.5
  Top Layer w0.5: v2(22.352,52.832) 22.352,53.687 22.894,54.229 C25.1 ; R24.1 28.448,59.309 ; v2(28.194,29.718) 29.226,28.686 R33.2@29.226,27.94 ; v2(28.561,60.438) 28.561,57.691 28.552,57.681 29.845,56.388 ; B4.6 32.626,64.135 35.166,61.595 B4.1 ; B3.6 32.412,56.388 34.29,58.266 34.29,62.484
  Top Layer w0.54: 29.845,56.388 B3.6
  Top Layer w1: 17.907,40.126 20.695,40.126 v2(22.352,41.783)
  Bottom Layer w0.5: v2(22.352,41.783) 21.674,41.105 21.674,36.238 v2(28.194,29.718) ; v2(22.352,52.832) 22.352,54.229 v2(28.561,60.438)
  Bottom Layer w1: v2(22.352,41.783) v2(22.352,52.832)
  other v1: 22.51,54.131
NetB3_7: B3.7 R23.1 | length 4.7
  Top Layer w0.5: R23.1@27.189,56.769 27.813,56.769 29.464,55.118 B3.7
NetB3_8: B3.8 C25.2 D5.1 | length 10.9
  Top Layer w0.5: C25.2@27.162,54.229 29.337,54.229 29.718,53.848 B3.8 33.147,53.848 35.301,51.694 D5.1
NetB4_2: B4.2 R23.2 R24.2 | length 22.1
  Top Layer w0.254: R23.2 R24.2
  Top Layer w0.5: v2@23.749,59.309 R24.2 ; B4.2 v2(38.227,62.865)
  Bottom Layer w0.5: v2(23.622,59.436) 27.051,62.865 v2(38.227,62.865)
NetB4_3: B4.3 B6.3 R29.2 | length 45.6
  Top Layer w0.5: v2(29.083,32.766) B6.3 ; B4.3 v2(38.227,64.135)
  Bottom Layer w0.254: v2(29.083,32.766) 28.575,32.766 25.527,35.814 25.527,41.275 26.924,42.672 30.099,42.672 39.386,51.959 R29.2
  Bottom Layer w0.5: v2(38.227,64.135) R29.2
NetB4_4: B4.4 R21.2 R22.2 | length 15.8
  Top Layer w0.254: R21.2 R22.2 25.289,65.802 26.035,66.548 33.274,66.548 34.417,65.405 B4.4
NetB5_2: B5.2 U1.43 | length 53.1
  Top Layer w0.254: v2(27.432,41.529) 28.448,40.513 B5.2 ; v2(50.292,62.484) 56.413,62.484 60.111,58.786 U1.43
  Bottom Layer w0.254: v2(27.432,41.529) 31.242,41.529 50.165,60.452 v2@50.165,62.484
NetB5_5: B5.5 R27.2 | length 5.9
  Top Layer w0.254: B5.5 37.211,37.973 37.719,37.465 37.719,34.798 38.227,34.29 R27.2@38.751,34.29
NetB5_7: B5.7 R25.2 | length 3.2
  Top Layer w0.5: B5.7 37.338,40.513 37.973,39.878 R25.2@38.878,39.878
NetB5_8: B5.8 C27.2 D6.1 | length 9.3
  Top Layer w0.5: D6.1 36.349,46.201 38.816,43.734 38.816,41.975 38.624,41.783 B5.8
NetB6_2: B6.2 R25.1 R26.2 | length 18
  Top Layer w0.254: R26.2 v2(40.751,38.608) R25.1
  Top Layer w0.5: v2(29.083,34.036) B6.2
  Bottom Layer w0.5: v2(29.083,34.036) 36.179,34.036 v2(40.751,38.608)
NetB6_4: B6.4 R27.1 R28.2 | length 13.6
  Top Layer w0.5: B6.4 v2(32.512,31.496) ; R28.2 R27.1
  Bottom Layer w0.5: v2(32.512,31.496) 33.193,30.815 38.054,30.815 40.132,32.893 v2(40.751,32.893)
NetBattery_1: Battery.1 SW_Power.1 | length 11.5
  Top Layer w3: SW_Power.1 4.763,14.033 6.423,12.373 Battery.1
NetC4_1: C4.1 Q1.2 Q2.3 R1.1 | length 18.8
  Top Layer w0.254: R1.1@49.938,7.128 C4.1 55.356,7.128 v2(55.372,7.112) ; Q2.3 64.262,7.112 v2(64.774,7.624) 65.287,8.137 Q1.2
  Bottom Layer w0.254: v2(55.372,7.112) 64.262,7.112 v2(64.774,7.624)
NetC5_1: C5.1 Q3.2 Q4.3 R2.1 | length 20.1
  Top Layer w0.254: C5.1 R2.1@52.17,2.81 ; R2.1 53.951,2.783 54.273,2.461 60.403,2.461 61.156,3.214 61.156,4.836 60.37,5.622 Q4.3 58.218,6.783 59.243,7.808 Q3.2
NetC6_2: C6.2 Q5.2 Q6.2 R3.2 | length 17.3
  Top Layer w0.254: R3.2 C6.2 55.388,24.368 57.258,22.498 Q6.2 55.895,21.497 55.077,20.679 55.077,17.721 56.102,16.696 Q5.2
NetC7_2: C7.2 Q7.2 Q8.2 R4.2 | length 20.8
  Top Layer w0.254: R4.2 C7.2 54.086,18.812 v2(54.102,18.796) ; v2(61.976,15.748) 61.976,16.434 62.365,16.823 Q7.2 ; Q7.2@63.302,16.908 Q8.2
  Bottom Layer w0.254: v2(54.102,18.796) 54.102,17.907 56.261,15.748 v2(61.976,15.748)
NetC16_2: C16.2 C17.2 F1.2 U1.9 | length 8.7
  Top Layer w0.254: v2(54.102,48.514) 54.324,48.292 U1.9
  Bottom Layer w0.254: v2(54.102,48.514) 54.598,48.018 C17.2 C16.2 56.567,50.875 56.297,51.145 F1.2
NetC18_2: C18.2 U1.5 XTAL.2 | length 10
  Top Layer w0.254: XTAL.2 50.386,51.305 ccw(c52.832,53.752) 52.832,50.292 U1.5
  Bottom Layer w0.254: XTAL.2@49.282,52.409 C18.2
NetC19_2: C19.2 U1.6 XTAL.1 | length 10.2
  Top Layer w0.254: XTAL.1 51.023,49.048 cw(c52.819,47.252) 52.819,49.792 U1.6
  Bottom Layer w0.254: C19.2@49.393,45.016 XTAL.1
NetC21_2: C21.2 R38.1 Reg3V3.2 Reg3V3.4 | length 14.5
  Bottom Layer w0.5: C21.2@13.589,55.451 Reg3V3.2 Reg3V3.4 R38.1@18.325,65.262
NetC24_2: C24.2 R37.1 Reg5V.3 | length 6.3
  Top Layer w0.5: C24.2 14.982,57.138 16.487,57.138 Reg5V.3
NetDXL_Encoder_A2: DXL_Encoder.A2 U1.25 | length 33.8
  Top Layer w0.254: U1.25@64.389,46.787 67.234,46.787 67.742,46.279 v2(67.742,45.974) ; v2(67.742,50.165) 69.698,50.165 73.812,46.05 73.812,35.484 76.784,32.512 DXL_Encoder.A2
  Bottom Layer w0.254: v2(67.742,45.974) v2(67.742,50.165)
NetDXL_Encoder_A4: DXL_Encoder.A4 U1.27 | length 32.5
  Top Layer w0.254: U1.27 68.692,47.792 72.644,43.84 72.644,29.388 74.6,27.432 DXL_Encoder.A4
NetDXL_Encoder_A6: DXL_Encoder.A6 U1.26 | length 35.1
  Top Layer w0.254: U1.26@64.364,47.295 68.402,47.295 71.907,43.79 71.907,28.296 77.851,22.352 DXL_Encoder.A6
NetH-b1(+m)_1: H-b1(+m).1 H-b2(+m).1 Motor+.1 | length 11.2
  Top Layer w1: Motor+.1 8.847,40.126 8.847,37.925 11.387,35.385 11.387,34.066
NetH-b1(-m)_2: H-b1(-m).2 H-b2(-m).2 Motor-.1 | length 35
  Top Layer w0.254: 16.079,34.061 ccw(c15.342,34.061) 16.079,34.061
  Top Layer w1: Motor-.1 4.717,34.048 4.717,32.469 6.234,30.953 13.731,30.953 15.367,32.589 15.367,34.066
  Bottom Layer w0.254: 16.078,34.087 ccw(c15.367,34.087) 16.078,34.087 ; 16.104,40.107 ccw(c15.342,40.107) 16.104,40.107
  Bottom Layer w1: 15.367,34.066 15.367,40.126
NetIN_1: IN.1 SW_Power.2 | length 12.7
  Top Layer w3: IN.1@5.588,26.289 8.088,26.289 8.382,26.289 9.716,24.955 SW_Power.2
NetMotor_DXL_3: Motor_DXL.3 R40.1 U2.6 | length 17.2
  Top Layer w0.5: U2.6 70.554,9.226 71.217,8.563 74.32,8.563 Motor_DXL.3
NetQ1_1: Q1.1 Q2.1 R5.2 | length 11.3
  Top Layer w0.254: Q1.1 63.387,3.734 Q2.1 63.302,3.023 63.696,2.629 66.819,2.629 67.46,3.271 R5.2
NetQ3_1: Q3.1 Q4.1 R6.2 | length 7.7
  Top Layer w0.254: R6.2 Q3.1@57.268,8.906 ; Q4.1 57.343,3.607 Q3.1
NetQ5_1: Q5.1 Q6.1 R7.1 | length 7.8
  Top Layer w0.254: R7.1 58.293,23.495 59.178,22.61 Q6.1 59.243,21.432 Q5.1
NetQ7_1: Q7.1 Q8.1 R8.1 | length 7.2
  Top Layer w0.254: R8.1 64.516,23.114 65.222,22.408 Q8.1 65.287,21.559 Q7.1
NetR6_1: R6.1 U1.17 | length 52.1
  Top Layer w0.254: R6.1 v2(54.864,12.192) ; U1.17@59.614,45.568 59.614,40.792 62.484,37.922 62.484,25.273 v2(60.706,23.495)
  Bottom Layer w0.254: v2(54.864,12.192) 64.008,12.192 67.183,15.367 67.183,21.082 64.77,23.495 v2(60.706,23.495)
NetR8_2: R8.2 U1.18 | length 21.6
  Top Layer w0.254: U1.18 60.111,41.184 64.491,36.805 R8.2@64.491,25.705
NetR9_1: R9.1 U1.44 | length 8.1
  Top Layer w0.254: v2(58.801,58.293) 59.611,57.483 U1.44
  Bottom Layer w0.254: v2(58.801,58.293) 59.715,57.379 R9.1
NetR13_1: R13.1 R14.2 U1.14 | length 69.6
  Top Layer w0.254: v2(39.243,23.749) 45.506,23.749 46.675,24.918 46.675,32.865 58.111,44.301 U1.14
  Bottom Layer w0.254: R13.1@28.813,19.569 R14.2 ; R13.1 28.824,10.673 30.48,9.017 38.1,9.017 39.243,10.16 v2(39.243,23.749)
NetR15_1: R15.1 R16.2 U1.12 | length 26.8
  Top Layer w0.254: R15.1@44.815,25.554 R16.2 44.815,28.352 46.142,29.679 46.142,33.014 49.657,36.529 49.657,41.529 54.92,46.792 U1.12
NetR17_1: R17.1 R18.2 U1.11 | length 17
  Top Layer w0.254: R17.1@44.332,39.88 R18.2 ; R17.1 45.482,39.878 47.004,39.878 54.418,47.292 U1.11
NetR33_1: R33.1 R34.2 U1.15 | length 42.5
  Top Layer w0.254: R34.2@31.279,25.746 R33.1 ; R33.1@31.38,28.067 v2(32.385,28.067) ; v2(48.895,27.178) 48.895,32.512 56.654,40.271 56.654,40.278 58.611,42.235 U1.15
  Bottom Layer w0.254: v2(32.385,28.067) 33.274,27.178 v2(48.895,27.178)
NetR35_1: R35.1 R36.2 U1.10 | length 24.2
  Top Layer w0.254: R36.2@44.696,30.889 R35.1 45.247,33.001 46.863,34.617 46.857,34.623 v2(46.857,38.367) ; v2(46.863,42.164) 48.624,42.164 54.229,47.769 U1.10@56.288,47.769
  Bottom Layer w0.254: v2(46.857,38.367) 46.857,42.158 v2(46.863,42.164)
NetR39_1: R39.1 U1.22 U2.1 | length 34.6
  Top Layer w0.254: U1.22 62.111,41.775 69.821,34.065 69.821,27.934 73.094,24.661 U2.1 73.094,18.039 73.927,17.205 R39.1
NetR41_1: R41.1 R42.2 U2.7 | length 5.9
  Top Layer w0.254: v2(71.803,18.074) 71.824,18.054 U2.7
  Bottom Layer w0.254: R41.1@70.376,16.993 R42.2 71.497,18.381 v2(71.803,18.074)
NetR43_1: R43.1 R45.2 U3.3 | length 5.1
  Bottom Layer w0.254: R45.2 51.572,30.89 R43.1 51.588,32.96 51.588,33.925 51.852,34.189 U3.3
NetR44_1: R44.1 R46.2 U3.2 | length 5.1
  Bottom Layer w0.254: R46.2 52.97,32.948 R44.1 52.939,33.912 53.122,34.095 U3.2
NetR44_2: R44.2 U1.13 U3.1 | length 18.5
  Top Layer w0.254: v2(51.012,38.706) 51.803,38.706 57.611,44.513 U1.13
  Bottom Layer w0.254: v2(51.012,38.706) 53.014,38.706 52.987,38.679 54.392,37.274 U3.1 54.392,34.57 54.966,33.996 R44.2
NetST-link_2: ST-link.2 U1.34 | length 16.5
  Top Layer w0.254: U1.34 70.174,51.292 v2(73.687,47.779)
  Bottom Layer w0.254: v2(73.687,47.779) 75.619,45.847 ST-link.2
NetST-link_3: ST-link.3 U1.37 | length 22.8
  Top Layer w0.254: U1.37 63.111,55.567 64.44,56.896 68.961,56.896 72.771,53.086 74.295,51.562 v2(74.295,49.403)
  Bottom Layer w0.254: v2(74.295,49.403) 77.597,49.403 ST-link.3
NetU1_20: U1.20 U2.2 U2.3 | length 36.7
  Top Layer w0.254: U1.20 61.111,41.491 67.475,35.127 67.475,18.156 68.063,17.567 70.142,17.567 70.554,17.979 U2.3
  Top Layer w0.5: U2.3 U2.2
NetU1_21: U1.21 U2.4 | length 28.8
  Top Layer w0.254: U1.21 61.611,41.633 69.298,33.946 U2.4@69.298,19.913
NRST: C20.1 R10.2 ST-link.5 SW_Reset.1 SW_Reset.2 U1.7 | length 56.5
  Top Layer w0.254: v2(53.086,49.022) 53.356,49.292 U1.7 ; v2(62.565,61.549) 62.647,61.631 SW_Reset.2
  Bottom Layer w0.254: v2(53.086,49.022) 53.086,57.15 57.485,61.549 v2(62.565,61.549) ; SW_Reset.2 SW_Reset.1 ; R10.2 C20.1 80.297,62.754 SW_Reset.1 ; ST-link.5 79.629,53.467 81.42,55.258 SW_Reset.1
PWM1: R5.1 U1.29 | length 57.6
  Top Layer w0.254: U1.29 68.658,48.792 69.799,47.65 v2(70.688,47.65) ; R5.1@67.44,5.908 v2(67.44,7.02)
  Bottom Layer w0.254: v2(67.44,7.02) 70.774,7.02 75.133,11.379 75.133,19.939 68.174,26.899 68.174,39.751 ; 68.174,39.776 68.174,39.751 ; v2(70.688,47.65) 70.688,42.266 68.174,39.751
PWM2: R7.2 U1.30 | length 33.1
  Top Layer w0.254: R7.2 v2(58.293,28.219) ; U1.30@64.389,49.301 69.342,49.301 69.774,48.87 v2(69.774,48.793)
  Bottom Layer w0.254: v2(58.293,28.219) 67.539,37.465 67.539,40.208 69.748,42.418 v2@69.748,48.87
SWO: ST-link.4 U1.39 | length 21.8
  Top Layer w0.254: U1.39 62.111,55.355 64.211,57.455 69.367,57.455 75.895,50.927 ST-link.4
pads on no net: DXL_Encoder.A1 DXL_Encoder.A3 DXL_Encoder.A5 Spacer2.0 Spacer4.1 U1.2 U1.3 U1.4 U1.16 U1.19 U1.28 U1.31 U1.32 U1.33 U1.38 U1.40 U1.41 U1.42 U3.5 U3.6 U3.7
copper on no net:
  other v1: 52.606,27.681

## Polygon pours and split planes (outlines as drawn)
GND on Bottom Layer "GND" (solid, remove dead copper, pour order 4): 82.931,67.818 82.887,67.774 0.015,67.774 0.015,0.015 0,0 82.931,0 82.931,67.818
GND on Top Layer "GND" (solid, remove dead copper, pour order 2): 82.931,67.818 0,67.818 0,0 82.931,0 82.931,67.818

## Keep-outs
Keep-Out Layer:
  the board outline again, w0.254

## Other copper
Top Layer:
  rectangle net 3V3: 68.986,35.839 70.51,37.49
  rectangle net +12V: 24.257,4.039 26.492,5.944
  rectangle net NetB3_6: 21.461,41.136 23.005,42.427
  rectangle net NetB4_2: 23.049,58.919 24.176,59.835
  rectangle net NetB3_6: 21.837,52.431 22.914,54.464
  rectangle net NetB3_6: 28.056,59.933 28.97,60.85
  rectangle net 3V3: 62.542,66.214 64.974,67.272
  rectangle net IP-: 22.555,36.421 23.607,38.491
  rectangle net NetIN_1: 8.128,14.351 11.176,19.685
  rectangle net NetBattery_1: 3.302,14.224 6.35,19.431
  rectangle net NetB3_6: 30.099,63.881 31.578,65.659
  rectangle net NetB3_6: 33.83,61.676 34.719,62.796
  rectangle net NetB1_5: 36.703,10.414 37.719,11.43
  rectangle net NetB1_5: 40.64,4.699 42.246,9.271
  rectangle net IP+: 36.576,23.495 37.256,24.257
  rectangle net IP+: 35.478,31.242 36.957,33.02
  rectangle net IP+: 40.767,18.415 42.246,22.86
  rectangle net IP+: 41.656,34.671 42.926,35.941
  rectangle net H-BRIDGE2(+12V): 30.099,61.341 31.578,63.246
  rectangle net H-BRIDGE2(+12V): 35.478,33.782 36.957,35.687
  rectangle net H-BRIDGE1(+12V): 33.401,12.446 34.925,14.986
  rectangle net H-BRIDGE1(+12V): 42.266,12.446 45.085,14.986
  rectangle net H-BRIDGE1(+12V): 57.556,12.471 58.877,13.868
  rectangle net 3V3: 62.611,42.926 63.754,43.942
  rectangle net 3V3: 56.515,55.118 57.785,56.134
  rectangle net 3V3: 65.786,51.816 66.929,52.832
  rectangle net +5V: 25.908,27.686 27.686,29.464
  rectangle net +5V: 19.812,54.991 21.082,57.785
  rectangle net +5V: 72.169,11.398 73.335,12.22
  rectangle net NetH-b1(+m)_1: 3.683,39.014 5.791,41.148
  rectangle net NetH-b1(-m)_2: 3.683,33.172 5.766,35.027
  rectangle net NetH-b1(+m)_1: 7.874,39.116 9.779,41.021
  rectangle net NetH-b1(+m)_1: 10.541,33.147 12.319,34.925
  rectangle net NetB3_6: 17.018,39.243 18.72,40.996
  rectangle net NetB1_5: 33.985,24.587 35.154,25.654
  rectangle net H-BRIDGE1(+12V): 21.666,16.078 23.495,17.907
  pour cut-out: 57.353,46.812 57.328,46.838 57.328,48.539 57.658,48.539 57.683,48.565 57.683,46.812
  pour cut-out: 62.382,46.507 62.382,46.812 57.429,46.812 57.429,46.507
  pour cut-out: 63.322,52.299 62.89,52.299 62.89,52.045 63.322,52.045
  pour cut-out: 63.398,51.562 62.992,51.562 62.992,46.66 62.967,46.634 63.373,46.634 63.373,51.537
  pour cut-out: 58.344,52.603 58.344,52.299 63.322,52.299 63.322,52.578 58.369,52.578
  pour cut-out: 57.353,52.451 57.252,52.349 57.252,49.149 57.633,49.149 57.633,52.426 57.252,52.426
  pour cut-out: 51.723,55.608 51.689,55.574 51.689,44.196 46.609,44.196 46.609,55.626 51.689,55.626
Bottom Layer:
  rectangle net 3V3: 69.012,35.89 70.561,37.567
  rectangle net +12V: 24.384,4.039 26.467,5.944
  rectangle net NetB3_6: 21.46,41.099 22.99,42.419
  rectangle net NetB4_2: 23.065,58.93 24.154,59.834
  rectangle net NetB3_6: 21.799,52.633 22.908,54.47
  rectangle net NetB3_6: 28.045,59.936 28.964,60.862
  rectangle net IP-: 22.581,36.463 23.614,38.481
  rectangle net NetB1_5: 36.703,10.414 37.719,11.43
  rectangle net IP+: 41.662,34.671 42.926,35.941
  rectangle net H-BRIDGE2(+12V): 24.575,53.248 25.314,54.392
  rectangle net 3V3: 62.611,42.926 63.754,43.942
  rectangle net 3V3: 56.515,55.118 57.785,56.134
  rectangle net 3V3: 65.786,51.816 66.929,52.832
  rectangle net 3V3: 62.992,58.801 64.008,60.452
  rectangle net 3V3: 62.532,66.23 64.994,67.279
  region net +5V: 27.686,29.464 25.908,29.464 25.908,27.686 27.686,27.686
  rectangle net +5V: 19.685,51.816 20.828,53.721
  rectangle net +5V: 19.812,54.991 21.082,57.785
  rectangle net +5V: 72.03,11.388 73.247,12.231
  rectangle net +5V: 47.846,14.173 49.2,16.353
  rectangle net NetB1_5: 16.967,33.223 18.821,34.976
  rectangle net NetB1_5: 33.985,24.613 35.128,25.629
  pour cut-out: 51.689,55.575 51.638,55.626 46.609,55.626 46.609,44.171 51.689,44.171

## Silkscreen, mask and mechanical layers (free items; w line width, h text height)
Top Overlay:
  drawing of 877 lines, arcs and shapes, not listed
  text "MRL-HSL" at 53.776,65.858 h0.7
  text "MotorDriver_Version1.0" at 48.497,64.642 h0.7
  text "Winter2019" at 53.168,63.26 h0.7
  text "Mechatronic Research Labratory" at 53.744,58.338 h0.73

## Text inside footprints (layer, text, board x,y; h text height)
DXL_Encoder: Top Overlay "A0" at 76.962,37.338 h0.7; Top Overlay "A1" at 77.089,34.798 h0.7; Top Overlay "A2" at 76.962,32.131 h0.7; Top Overlay "A3" at 76.962,29.718 h0.7; Top Overlay "A4" at 77.089,27.178 h0.7; Top Overlay "A5" at 77.089,24.638 h0.7; Top Overlay "A6" at 77.089,22.098 h0.7; Top Overlay "A7" at 76.962,19.685 h0.7